# Altium PCB LCDTest.PcbDoc (part 2 of 2)
Units mm, origin at the board's own origin, x right, y up, seen from the top; angles counter-clockwise.
Board outline 42.58 x 45.09 mm, 4 copper layers (Top Layer, Internal Plane 1, Signal Layer 1, Bottom Layer), stack 0.72 mm thick; 136 components, 113 nets, 730 pads, 484 vias.
Unrouted connection lines stored in the file: 1.
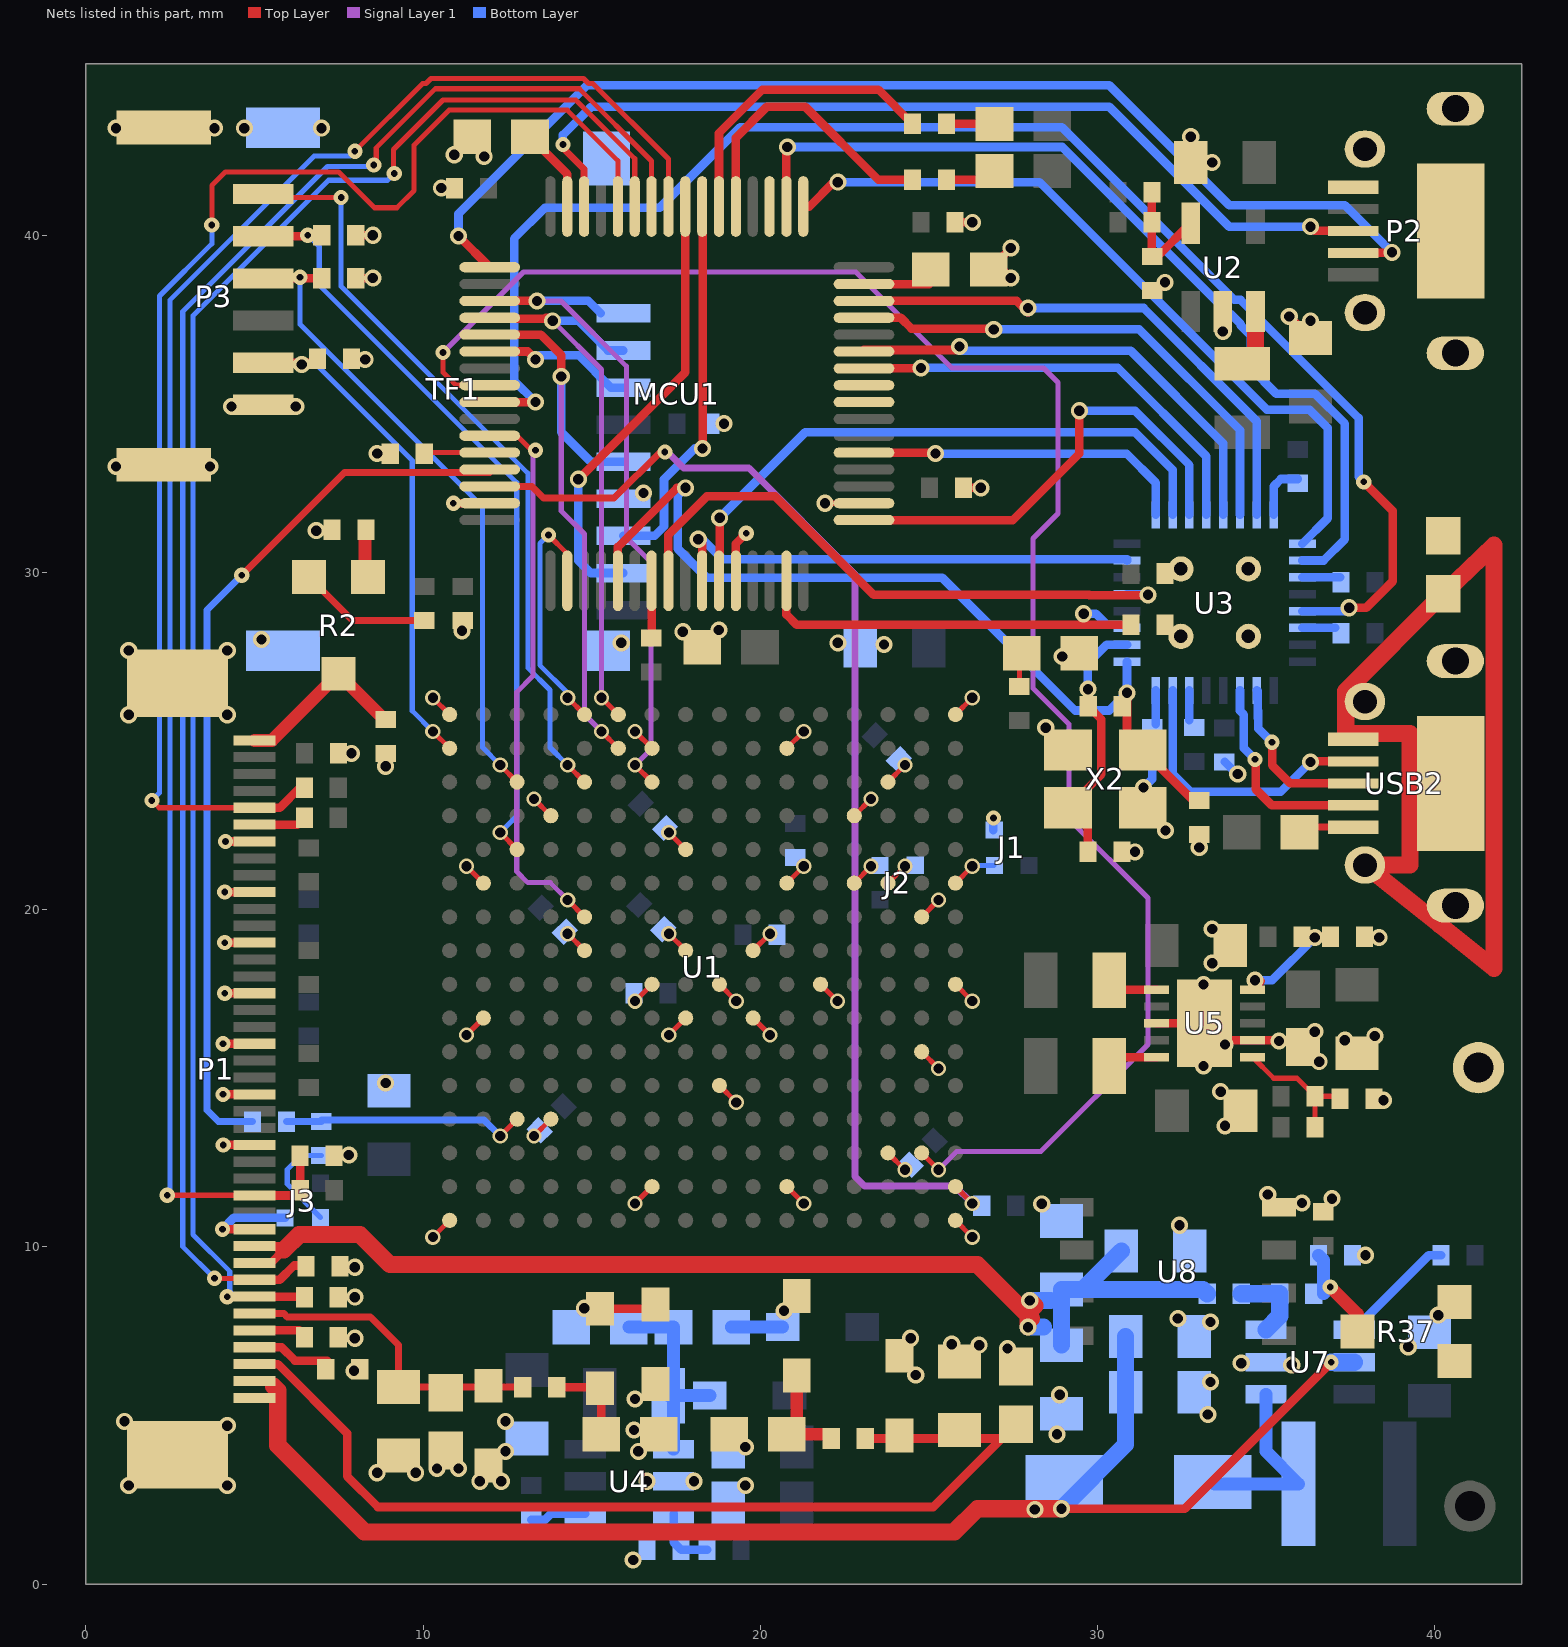
[diagram p4: the nets of this part, all layers, seen from the top]

## Via types
v1: diameter 0.45, hole 0.3, Top Layer to Bottom Layer, 255 vias
v2: diameter 0.508, hole 0.305, Top Layer to Bottom Layer, 165 vias
v3: diameter 0.45, hole 0.2, Top Layer to Bottom Layer, 64 vias

## Nets (pads, with @x,y where several pads share a name; then routed paths per layer and width w, separated by ;. In a path a pad name is that pad's centre, name@x,y a point inside that pad or via, vN(x,y) a via of type N, cw(c..) or ccw(c..) an arc to the next point about the centre after c; other vN are vias at no path point) (continued)
FPGA_CLK2: MCU1.59 U1.E10 | length 16.7
  Top Layer w0.152: MCU1.59@11.976,34.056 12.782,34.056 v3@13.183,33.655 ; v1(14.288,20.288) U1.E10@14.788,19.788
  Signal Layer 1 w0.152: v3(13.335,33.63) 13.262,33.557 13.262,26.937 12.776,26.451 12.776,21.133 13.106,20.803 13.773,20.803 v1(14.288,20.288)
FPGA_MCLK: MCU1.40 TF1.8 U1.T8 | length 14
  Top Layer w0.152: U1.T8@25.788,17.788 v1(26.288,17.288)
  Top Layer w0.254: v2(14.605,32.766) 17.776,35.937 MCU1.40@17.776,40.856
  Bottom Layer w0.254: v2(14.605,32.766) 14.605,30.353 14.972,29.986 TF1.8@15.942,29.986
GND: C1.1 C2.1 C3.1 C4.1 C5.1 C6.1 C7.1 C9.1 C10.1 C11.2 C12.1 C13.2 C14.2 C15.1 C16.1 C17.2 C18.2 C19.2 C20.2 C21.2 C22.2 C23.2 C24.2 C25.2 C27.2 C29.2 C30.2 C31.1 C33.1 C35.2 C36.2 C37.1 C38.1 C39.1 C40.1 C50.1 C51.1 C52.1 C53.2 C54.1 C68.1 C108.1 C109.2 C110.1 D2.1 D5.2 D6.2 J1.3 J2.3 J3.3 LED3.2 MCU1.12 MCU1.18 MCU1.63 P1.0 P1.7 P1.10 P1.13 P1.16 P1.19 P1.22 P1.25 P1.30 P2.5 P3.0 P3.6 pad.1 R3.1 R6.1 R8.1 R10.2 R12.1 R15.1 R16.2 R17.1 R18.1 R19.1 R20.1 R31.1 R37.2 R40.1 R41.1 R47.2 R48.2 R49.2 R50.2 R62.1 R64.2 TF1.6 TF1.SHELL U1.A1 U1.A16 U1.B7 U1.B11 U1.D4 U1.D13 U1.E9 U1.G2 U1.G8 U1.G15 U1.H7 U1.H9 U1.H12 U1.J5 U1.J8 U1.K7 U1.K9 U1.L2 U1.L15 U1.M8 U1.N13 U1.P3 U1.P11 U1.P14 U1.R6 U1.R10 U1.T1 U1.T16 U2.2 U3.0 U4.2 U5.2 U5.8 U5.11 U7.2 U8.4 X2.2 X2.4 | length 49.9
  Top Layer w0.152: v1(10.288,10.288) U1.A1@10.788,10.788 ; v1(10.288,26.288) U1.A16@10.788,25.788 ; v1(11.288,16.288) U1.B7@11.788,16.788 ; v1(11.288,21.288) U1.B11@11.788,20.788 ; v1(13.288,13.288) U1.D4@13.788,13.788 ; v1(13.288,23.288) U1.D13@13.788,22.788 ; v1(14.288,19.288) U1.E9@14.788,18.788 ; v1(16.288,11.288) U1.G2@16.788,11.788 ; v1(16.288,17.288) U1.G8@16.788,17.788 ; v1(16.288,25.288) U1.G15@16.788,24.788 ; v1(17.288,16.288) U1.H7@17.788,16.788 ; v1(17.288,19.288) U1.H9@17.788,18.788 ; v1(17.288,22.288) U1.H12@17.788,21.788 ; U1.J5@18.788,14.788 v1(19.288,14.288) ; U1.J8@18.788,17.788 v1(19.288,17.288) ; U1.K7@19.788,16.788 v1(20.288,16.288) ; U1.K9@19.788,18.788 v1(20.288,19.288) ; U1.L2@20.788,11.788 v1(21.288,11.288) ; U1.L15@20.788,24.788 v1(21.288,25.288) ; U1.M8@21.788,17.788 v1(22.288,17.288) ; v2(21.919,32.056) MCU1.18@23.076,32.056 ; U1.N13@22.788,22.788 v1(23.288,23.288) ; U1.P3@23.788,12.788 v1(24.288,12.288) ; U1.P11@23.788,20.788 v1(24.288,21.288) ; U1.P14@23.788,23.788 v1(24.288,24.288) ; U1.R6@24.788,15.788 v1(25.288,15.288) ; U1.R10@24.788,19.788 v1(25.288,20.288) ; U1.T1@25.788,10.788 v1(26.288,10.288) ; U1.T16@25.788,25.788 v1(26.288,26.288)
  Top Layer w0.254: v3(4.047,10.524) P1.30@5,10.524 ; v3(4.067,16.024) P1.19@5,16.024 ; v3(4.069,14.524) P1.22@5,14.524 ; v3(4.07,13.024) P1.25@5,13.024 ; v3(4.115,19.024) P1.13@5,19.024 ; v3(4.116,20.524) P1.10@5,20.524 ; v3(4.117,17.524) P1.16@5,17.524 ; v3(4.142,22.024) P1.7@5,22.024 ; R49.2@8.001,38.735 v2(8.509,38.735) ; R48.2@8.001,40.005 v2(8.509,40.005) ; v2(10.541,41.402) C4.1@10.93,41.402 ; v3(10.898,32.056) MCU1.63@11.976,32.056 ; v2(10.922,42.393) C11.2@11.455,42.926 11.811,42.57 v2(11.811,42.342) ; MCU1.12@19.276,29.756 19.276,30.858 v3(19.583,31.166) ; C5.1@25.773,40.386 v2(26.289,40.386) ; C6.1@26.027,32.512 v2(26.543,32.512) ; C25.2@26.772,38.989 C25.2@26.797,38.989 ; v2(27.432,38.735) 27.178,38.989 C25.2@26.797,38.989 ; v2(27.432,39.624) C25.2@26.797,38.989 ; v2(28.466,25.4) X2.4@29.126,24.74 ; C110.1@30.726,21.717 v2(31.115,21.717) ; X2.2@31.344,23.026 v2(32.018,22.352) ; R12.1@31.623,38.362 31.758,38.362 v2(32.004,38.608) ; U5.8@31.75,16.629 U5.11@33.176,16.629 ; v2(32.766,42.926) C33.1@32.766,42.164 v2(33.401,42.164) ; v2(33.02,21.844) C108.1@33.02,22.233 ; U5.11@33.676,16.129 U5.2@34.601,16.129 v2@35.357,16.129 ; v2(33.718,37.147) U2.2@33.718,37.739 ; v2(35.687,37.592) C12.1@36.322,36.957 v2(36.322,37.465)
  Bottom Layer w0.254: v3(4.047,10.524) 4.385,10.862 J3.3@5.91,10.862 ; J1.3@26.915,22.361 v3(26.915,22.724) ; v2(31.369,23.622) 31.623,23.876 R62.1@31.623,24.392 ; C109.2@33.782,24.384 34.163,24.003 v2(34.163,24.028)
  other v2: 16.231,0.711 1.27,2.921 4.191,2.921 19.558,2.921 11.684,3.048 12.319,3.048 16.637,3.048 18.034,3.048 8.636,3.302 9.779,3.302 10.414,3.429 11.049,3.429 12.446,3.937 16.383,3.937 19.558,4.064 28.804,4.445 16.256,4.572 4.191,4.699 1.143,4.826 12.446,4.826 33.274,5.029 16.281,5.486 28.88,5.613 33.35,5.994 24.613,6.198 7.95,6.325 35.763,6.502 34.265,6.553 27.33,6.985 39.218,7.036 26.492,7.087 25.679,7.112 7.976,7.29 24.46,7.29 33.35,7.772 32.385,7.874 40.107,7.976 7.976,8.509 7.976,9.398 37.948,9.754 32.436,10.643 28.346,11.278 36.068,11.303 36.957,11.43 35.052,11.557 7.798,12.725 33.782,13.589 38.481,14.351 33.655,14.605 8.89,14.859 33.147,15.367 36.576,15.494 33.782,16.002 35.382,16.104 37.338,16.129 38.227,16.256 36.449,16.383 33.147,17.78 33.401,18.415 38.354,19.177 33.401,19.431 8.89,24.257 7.874,24.638 1.27,25.781 4.191,25.781 28.956,27.508 1.27,27.686 4.191,27.686 23.673,27.864 15.875,27.915 22.301,27.915 5.207,28.016 17.704,28.245 11.151,28.27 18.771,28.296 6.833,31.242 16.535,32.36 0.889,33.147 3.683,33.147 8.636,33.528 18.923,34.417 4.318,34.925 6.223,34.925 8.28,36.322 0.889,43.18 3.81,43.18 4.699,43.18 6.985,43.18
HSWAPEN: MCU1.61 R45.1@4.936,13.716 | length 26.5
  Top Layer w0.203: v3(4.623,29.921) 7.671,32.969 11.976,32.969 MCU1.61@11.976,33.056
  Bottom Layer w0.203: v3(4.623,29.921) 3.588,28.887 3.588,14.053 3.926,13.716 R45.1@4.936,13.716
INIT_B: MCU1.56 U1.R3 | length 52.5
  Top Layer w0.152: v3(10.592,36.525) 10.592,35.941 10.977,35.556 MCU1.56@11.976,35.556 ; U1.R3@24.788,12.788 v1(25.288,12.288)
  Signal Layer 1 w0.152: v3(10.592,36.525) 12.979,38.913 22.835,38.913 25.679,36.068 28.397,36.068 28.829,35.636 28.829,31.75 28.092,31.013 28.092,26.568 29.159,25.502 29.159,22.682 31.496,20.345 31.496,16.002 28.321,12.827 25.827,12.827 v1(25.288,12.288)
NetC8_2: C8.2 R7.2 R10.1 U5.1 | length 4
  Top Layer w0.152: U5.1@34.601,15.629 35.227,15.003 35.919,15.003 C8.2@36.452,14.469 ; R7.2@36.452,13.555 C8.2@36.452,14.469 ; R10.1@37.197,14.393 37.121,14.469 C8.2@36.452,14.469
NetC11_1: C11.1 MCU1.47 | length 2.5
  Top Layer w0.254: C11.1@13.169,42.926 14.276,41.819 MCU1.47@14.276,40.856
NetC23_1: C23.1 P1.1 R2.3 | length 5.2
  Top Layer w0.381: P1.1@5,25.024 5.521,25.024 R2.3@7.493,26.996 C23.1@8.843,25.646
NetC25_1: C25.1 MCU1.31 | length 1.9
  Top Layer w0.254: MCU1.31@23.076,38.556 C25.1@25.006,38.556
NetC28_1: C28.1 D1.1 D3.2 | length 1.5
  Bottom Layer w0.381: C28.1@19.138,7.62 D3.2@20.664,7.62
  other v2: 20.701,8.103
NetC28_2: C28.2 C32.2 D7.1 L3.2 U4.1 | length 6.2
  Bottom Layer w0.381: C32.2@16.104,7.62 C28.2@17.424,7.62 L3.2@17.424,5.588 ; L3.2@17.272,5.588 L3.2@17.424,5.588 ; U4.1@17.429,3.998 17.424,4.003 L3.2@17.424,5.588 ; D7.1@18.505,5.588 L3.2@17.424,5.588
NetC29_1: C29.1 D1.2 R26.1 | length 2.6
  Top Layer w0.381: C29.1@20.789,4.445 R26.1@21.979,4.445 ; C29.1@21.082,4.738 D1.2@21.082,6.186
NetC32_1: C32.1 D4.2 D5.1 | length 1.5
  Top Layer w0.254: D4.2@15.24,8.165 D5.1@16.764,8.165
  other v2: 14.783,8.179
NetC34_2: C34.2 R12.2 R13.1 U2.5 | length 3.5
  Top Layer w0.254: R12.2@31.615,39.378 R13.1@31.615,41.275 ; R12.2@31.623,39.37 31.779,39.37 U2.5@32.768,40.36
NetC35_1: C35.1 D4.1 R27.1 | length 2.7
  Top Layer w0.254: R27.1@13.962,5.842 15.203,5.842 D4.1@15.24,5.805 15.279,5.766 C35.1@15.279,4.445
NetC51_2: C51.2 C52.2 D9.2 P1.39 P1.40 U7.5 | length 42.8
  Top Layer w0.254: v2(28.931,2.235) 32.588,2.235 v3(36.932,6.579)
  Top Layer w0.508: 5.563,5.867 5.69,5.74 5.69,4.115 8.255,1.549 25.756,1.549 26.441,2.235 v2(28.931,2.235)
  Bottom Layer w0.508: v2(28.931,2.235) 30.836,4.14 C52.2@30.836,5.69 C51.2@30.836,7.341 ; v3(36.932,6.579) U7.5@37.618,6.579
  other v2: 28.143,2.21
NetC53_1: C53.1 R37.3 R38.1 | length 3.1
  Top Layer w0.381: v3(36.906,8.814) 37.715,8.005 R37.3@37.715,7.493
  Bottom Layer w0.381: C53.1@36.559,9.754 36.703,9.609 36.703,8.611 v3(36.906,8.814)
NetC108_2: C108.2 MCU1.5 R61.2 U3.25 X2.3 | length 25.6
  Top Layer w0.254: MCU1.5@15.776,29.756 15.776,30.762 17.526,32.512 v2(17.78,32.512) ; X2.3@30.877,25.206 v2(30.877,26.432) ; X2.3@31.344,24.74 31.346,24.74 32.334,23.751 32.334,23.749 32.842,23.241 C108.2@33.02,23.241
  Bottom Layer w0.254: v2(17.78,32.512) 17.551,32.283 17.551,30.709 18.415,29.845 25.4,29.845 29.337,25.908 30.353,25.908 v2(30.877,26.432) U3.25@30.877,27.358
NetC110_2: C110.2 R61.1 U3.26 X2.1 | length 7.8
  Top Layer w0.254: C110.2@29.718,21.717 29.718,22.434 X2.1@29.126,23.026 29.128,23.026 30.117,24.014 30.117,25.644 R61.1@29.726,26.035 29.726,26.535 v2(29.718,26.543)
  Bottom Layer w0.254: v2(29.718,26.543) 29.718,27.305 30.271,27.858 U3.26@30.877,27.858
NetD9_1: D9.1 L5.2 U7.1 | length 5.6
  Bottom Layer w0.381: D9.1@33.467,2.972 L5.2@35.964,2.972 34.997,3.939 U7.1@34.997,5.629
NetJ1_2: J1.2 U1.T11 | length 1.3
  Top Layer w0.152: U1.T11@25.788,20.788 v1(26.288,21.288)
  Bottom Layer w0.152: v1@26.311,21.311 J1.2@26.924,21.311
NetJ2_2: J2.2 U1.N11 | length 0.7
  Top Layer w0.152: U1.N11@22.788,20.788 v1(23.288,21.288)
NetJ3_2: J3.2 R42.1 | length 3
  Bottom Layer w0.152: J3.2@6.96,10.871 5.969,11.862 5.969,12.294 6.383,12.708 R42.1@6.985,12.708
NetL1_1: L1.1 U5.6 | length 1.4
  Top Layer w0.254: L1.1@30.407,17.797 30.575,17.629 U5.6@31.75,17.629
NetL2_1: L2.1 U5.10 | length 1.3
  Top Layer w0.254: L2.1@30.416,15.629 U5.10@31.75,15.629
NetL7_1: L7.1 U2.3 | length 1.2
  Top Layer w0.508: L7.1@34.684,36.589 U2.3@34.684,37.739
NetLED1_2: LED1.2 R21.2 | length 1.4
  Top Layer w0.254: R21.2@25.527,41.656 LED1.2@26.949,41.656
NetLED2_2: LED2.2 R22.2 | length 1.4
  Top Layer w0.254: R22.2@25.527,43.307 LED2.2@26.949,43.307
NetLED3_1: LED3.1 R43.2 | length 0.9
  Top Layer w0.152: R43.2@27.686,26.619 LED3.1@27.686,27.545
NetMCU1_2: MCU1.2 U1.E16 | length 7.6
  Top Layer w0.152: v3(13.716,31.115) 14.276,30.555 MCU1.2@14.276,29.756 ; v1(14.288,26.288) U1.E16@14.788,25.788
  Bottom Layer w0.152: v3(13.716,31.115) 13.462,30.861 13.462,27.253 14.288,26.427 v1(14.288,26.288)
NetMCU1_7: MCU1.7 R4.1 | length 1.7
  Top Layer w0.254: R4.1@16.776,28.071 MCU1.7@16.776,29.756
NetMCU1_24: MCU1.24
NetMCU1_25: MCU1.25
NetMCU1_35: MCU1.35
NetMCU1_37: MCU1.37 R21.1 | length 8.6
  Top Layer w0.254: MCU1.37@19.276,40.856 19.276,42.898 20.193,43.815 21.336,43.815 23.495,41.656 R21.1@24.519,41.656
NetMCU1_38: MCU1.38 R22.1 | length 8.9
  Top Layer w0.254: MCU1.38@18.776,40.856 18.776,43.033 20.066,44.323 23.503,44.323 R22.1@24.519,43.307
NetMCU1_41: MCU1.41 P1.28 R14.1 R15.2 | length 51.5
  Top Layer w0.152: v3(2.413,11.532) P1.28@4.992,11.532 ; v3(7.976,42.494) 9.987,44.505 10.089,44.505 10.237,44.653 14.756,44.653 14.904,44.505 15.032,44.505 17.276,42.262 MCU1.41@17.276,40.856
  Top Layer w0.254: P1.28@5,11.524 6.198,11.524 6.35,11.676 R15.2@6.35,12.7
  Bottom Layer w0.152: v3(2.413,11.532) 2.489,11.532 2.489,38.075 6.772,42.357 7.839,42.357 v3(7.976,42.494)
NetMCU1_42: MCU1.42 P1.33 R17.2 | length 51
  Top Layer w0.152: v3(3.81,9.068) P1.33@4.956,9.068 ; v3(8.534,42.088) 8.611,42.164 8.611,42.596 10.363,44.348 14.63,44.348 16.776,42.202 MCU1.42@16.776,40.856
  Top Layer w0.254: P1.33@5,9.024 5.747,9.024 6.172,9.449 R17.2@6.477,9.449
  Bottom Layer w0.152: v3(3.81,9.068) 2.87,10.008 2.87,37.744 7.166,42.041 8.487,42.041 v3(8.534,42.088)
NetMCU1_43: MCU1.43 P1.34 R18.2 | length 49.3
  Top Layer w0.152: v3(9.144,41.834) 9.119,41.859 9.119,42.545 10.592,44.018 14.529,44.018 16.276,42.271 MCU1.43@16.276,40.856
  Top Layer w0.254: P1.34@5,8.524 R18.2@6.335,8.524
  Bottom Layer w0.152: v3(4.191,8.524) 4.303,8.636 4.318,8.636 4.264,8.69 4.264,9.275 3.175,10.363 3.175,37.617 7.192,41.634 8.944,41.634 v3(9.144,41.834)
NetMCU1_44: MCU1.44 P1.5 R9.2 | length 40.5
  Top Layer w0.152: v3(1.956,23.241) 2.173,23.024 P1.5@5,23.024 ; v3(3.734,40.31) 3.734,41.478 4.14,41.885 7.493,41.885 8.56,40.818 9.22,40.818 9.728,41.326 9.728,42.672 10.77,43.713 14.275,43.713 15.776,42.212 MCU1.44@15.776,40.856
  Top Layer w0.254: P1.5@5,23.024 5.752,23.024 6.35,23.622 R9.2@6.477,23.622
  Bottom Layer w0.152: v3(1.956,23.241) 2.184,23.47 2.184,38.201 3.734,39.75 v3(3.734,40.31)
NetMCU1_60: MCU1.60 R3.2 | length 1.9
  Top Layer w0.152: R3.2@10.061,33.556 MCU1.60@11.976,33.556
NetP1_6: P1.6 R11.2 | length 1.3
  Top Layer w0.254: P1.6@5,22.524 R11.2@6.268,22.524
NetP1_31: P1.31 P1.32 R8.2 R39.1 R40.2 R41.2 | length 35
  Top Layer w0.254: P1.32@5,9.524 5.485,9.524 5.867,9.906 ; P1.31@5,10.024 5.909,10.024
  Top Layer w0.508: 5.867,9.906 6.325,10.363 8.128,10.363 9.017,9.474 26.441,9.474 27.94,7.976 ; v2(27.94,7.62) 27.94,7.976 ; v2(27.991,8.407) 28.143,8.255 27.94,8.052 27.94,7.976 ; 28.042,7.874 27.94,7.976
  Bottom Layer w0.508: v2(27.94,7.62) 28.397,7.62 ; v2(27.991,8.407) R40.2@28.6,8.407 ; R8.2@28.931,7.087 R40.2@28.931,8.738 29.566,8.738 ; R41.2@30.709,9.881 29.566,8.738 ; R39.1@33.257,8.611 33.13,8.738 29.566,8.738
NetP1_36: P1.36 R19.2 | length 1.3
  Top Layer w0.254: P1.36@5,7.524 R19.2@6.319,7.524
NetP1_37: P1.37 R20.2 | length 2.3
  Top Layer w0.254: P1.37@5,7.024 5.803,7.024 6.198,6.629 R20.2@7.163,6.629
NetR1_1: R1.1 R2.2 | length 3.9
  Top Layer w0.203: R2.2@6.618,29.871 7.906,28.583 R1.1@10.033,28.583
NetR2_1: R2.1 R6.2 | length 1.2
  Top Layer w0.381: R2.1@8.28,29.959 R6.2@8.28,31.191
NetR5_2: R5.2 R16.1 U5.5 | length 3.7
  Top Layer w0.254: U5.5@34.601,17.629 34.849,17.877 34.819,17.907 v2(34.671,17.907) ; R5.2@36.071,19.194 R16.1@36.917,19.194
  Bottom Layer w0.254: v2(34.671,17.907) 35.179,17.907 v2(36.449,19.177)
NetR23_1: R23.1 U3.14 | length 1
  Bottom Layer w0.254: U3.14@36.077,28.358 R23.1@37.055,28.358
NetR24_1: R24.1 U3.11 | length 1.1
  Bottom Layer w0.254: U3.11@36.077,29.858 R24.1@37.206,29.858
NetR25_1: R25.1 U3.8 | length 1.7
  Bottom Layer w0.254: U3.8@35.227,31.708 35.227,32.56 35.441,32.774 R25.1@35.941,32.774
NetR28_1: R28.1 U7.4 | length 3.5
  Bottom Layer w0.254: U7.4@37.617,7.544 39.827,9.754 R28.1@40.191,9.754
NetR29_1: R29.1 U4.4 | length 1.7
  Bottom Layer w0.254: R29.1@13.208,1.913 13.622,1.913 13.792,2.083 U4.4@14.808,2.083
NetR30_1: R30.1 R31.2 U4.3 | length 1.9
  Bottom Layer w0.254: U4.3@17.429,2.083 17.429,1.24 R31.2@17.653,1.016 R30.1@18.423,1.016
NetR37_1: R37.1
NetR38_2: R38.2 R39.2 U7.3 | length 2.4
  Bottom Layer w0.508: R39.2@34.265,8.611 R38.2@35.408,8.611 35.408,7.955 U7.3@34.997,7.544
NetR42_2: R42.2 R45.2@5.944,13.716 U1.C4 | length 7.3
  Top Layer w0.152: v1(12.288,13.288) U1.C4@12.788,13.788
  Bottom Layer w0.203: R45.2@5.944,13.716 R42.2@6.985,13.716 6.985,13.767 11.809,13.767 v1(12.288,13.288)
NetR45_1: R45.1@21.031,21.547 U1.L11 | length 0.7
  Top Layer w0.152: U1.L11@20.788,20.788 v1(21.288,21.288)
NetR46_2: R46.2 USB2.1 | length 1.4
  Top Layer w0.203: R46.2@36.14,22.449 USB2.1@37.584,22.449
NetR47_1: R47.1 USB2.5 | length 31.9
  Top Layer w0.508: R47.1@40.259,29.376 37.363,26.48 37.363,25.222 39.268,25.222 39.268,21.324 USB2.5@37.934,21.324 40.153,19.548 41.758,18.263 41.758,30.81 R47.1@40.31,29.413
NetR60_2: R60.2 U3.22 | length 0.9
  Bottom Layer w0.254: R60.2@32.727,25.615 U3.22@32.727,26.508
NetR62_2: R62.2 U3.24 | length 1
  Bottom Layer w0.254: R62.2@31.727,25.504 U3.24@31.727,26.508
NetU3_23: U3.23 USB2.4 | length 8.4
  Top Layer w0.254: v2(36.322,24.384) 36.337,24.399 USB2.4@37.584,24.399
  Bottom Layer w0.254: U3.23@32.227,26.508 32.227,24.034 32.766,23.495 35.433,23.495 v2(36.322,24.384)
PA13: MCU1.46 P2.3 | length 27.6
  Top Layer w0.203: v3(14.148,42.697) 14.097,42.647 14.776,41.968 MCU1.46@14.776,40.856
  Top Layer w0.254: v2@36.449,40.132 P2.3@37.584,40.132
  Bottom Layer w0.254: v3(14.148,42.697) 14.148,42.977 14.986,43.815 30.353,43.815 33.909,40.259 v2(36.322,40.259)
PA14: MCU1.49 P2.2 | length 34.4
  Top Layer w0.254: v2(11.049,39.983) MCU1.49@11.976,39.056 ; P2.2@37.584,39.482 38.72,39.482 v2(38.735,39.497)
  Bottom Layer w0.254: v2(11.049,39.983) 11.049,40.64 14.859,44.45 30.353,44.45 33.909,40.894 37.338,40.894 v2(38.735,39.497)
PC8: MCU1.39 TF1.7 | length 11.4
  Top Layer w0.254: MCU1.39@18.276,40.856 18.288,40.844 v2(18.288,33.68)
  Bottom Layer w0.254: TF1.7@15.942,31.086 16.862,31.086 17.145,31.369 17.145,32.766 17.665,33.286 18.059,33.68 v2(18.288,33.68)
PC10: MCU1.51 TF1.1 U1.G14 | length 19.9
  Top Layer w0.152: v1(16.288,24.288) U1.G14@16.788,23.788
  Top Layer w0.254: MCU1.51@11.976,38.056 v2(13.379,38.056)
  Signal Layer 1 w0.152: v2(13.379,38.056) 14.09,38.056 16.027,36.119 16.027,31.039 16.764,30.302 16.764,24.764 v1(16.288,24.288)
  Bottom Layer w0.254: v2(13.379,38.056) 14.903,38.056 TF1.1@15.273,37.686
PC11: MCU1.52 TF1.2 U1.F16 | length 17
  Top Layer w0.152: v1(15.288,26.288) U1.F16@15.788,25.788
  Top Layer w0.254: MCU1.52@11.976,37.556 11.976,37.523 13.6,37.523 13.633,37.556 13.879,37.556 13.879,37.501 v2(13.843,37.465)
  Signal Layer 1 w0.152: v2(13.843,37.465) 15.288,36.02 15.288,28.397 15.291,28.394 15.291,26.291 v1(15.288,26.288)
  Bottom Layer w0.254: v2(13.843,37.465) 14.605,37.465 15.484,36.586 TF1.2@15.942,36.586
PC12: MCU1.53 TF1.5 U1.F15 | length 18.6
  Top Layer w0.152: v1(15.288,25.288) U1.F15@15.788,24.788
  Top Layer w0.254: MCU1.53@11.976,37.056 13.49,37.056 14.097,36.449 v2(14.097,35.814)
  Signal Layer 1 w0.152: v2(14.097,35.814) 14.097,31.826 14.783,31.14 14.783,25.793 v1(15.288,25.288)
  Bottom Layer w0.254: v2(14.097,35.814) 14.097,34.163 14.974,33.286 TF1.5@15.942,33.286
PD2: MCU1.54 TF1.3 | length 4.5
  Top Layer w0.254: MCU1.54@11.976,36.556 13.101,36.556 v2(13.335,36.322)
  Bottom Layer w0.254: v2(13.335,36.322) 13.462,36.449 14.605,36.449 15.568,35.486 TF1.3@15.942,35.486
PROGRAM: MCU1.62 R44.2 U1.T2 | length 35.4
  Top Layer w0.152: U1.T2@25.788,11.788 v1(26.288,11.288)
  Top Layer w0.203: MCU1.62@11.976,32.556 13.227,32.556 13.575,32.207 15.665,32.207 17.036,33.579 v3(17.17,33.579)
  Signal Layer 1 w0.203: v3(17.17,33.579) 17.247,33.579 17.729,33.096 19.66,33.096 22.809,29.947 22.809,28.125 22.809,27.704 22.809,12.09 23.09,11.809 25.767,11.809 v1(26.288,11.288)
TCK: P3.3 R49.1 U1.C14 | length 19.4
  Top Layer w0.152: v1(12.288,24.288) U1.C14@12.788,23.788
  Top Layer w0.254: P3.3@5.26,38.725 R49.1@6.983,38.725
  Bottom Layer w0.152: v3(6.35,38.76) 6.35,37.363 11.76,31.953 11.76,24.816 v1(12.288,24.288)
TDI: P3.2 R48.1 U1.C12 | length 22.9
  Top Layer w0.152: v1(12.288,22.288) U1.C12@12.788,21.788
  Top Layer w0.254: P3.2@5.26,39.975 R48.1@6.963,39.975
  Bottom Layer w0.152: v3(6.579,40.005) 6.921,39.662 6.921,38.519 12.776,32.664 12.776,22.776 v1(12.288,22.288)
TDO: P3.1 U1.E14 | length 22.7
  Top Layer w0.152: P3.1@5.26,41.225 5.362,41.123 v3(7.569,41.123) ; v1(14.288,24.288) U1.E14@14.788,23.788
  Bottom Layer w0.152: v3(7.569,41.123) 7.569,38.481 13.106,32.944 13.106,27.178 13.767,26.518 13.767,24.809 v1(14.288,24.288)
TMS: P3.5 R50.1 U1.A15 | length 14.9
  Top Layer w0.152: v1(10.288,25.288) U1.A15@10.788,24.788
  Top Layer w0.254: P3.5@5.26,36.225 R50.1@6.709,36.225
  Bottom Layer w0.152: v2@6.426,36.195 6.807,36.195 9.677,33.325 9.677,25.899 v1(10.288,25.288)
  other v2: 6.401,36.17
USB_HS_CK: MCU1.21 U3.1 | length 9.9
  Top Layer w0.254: MCU1.21@23.076,33.556 v2@25.169,33.556
  Bottom Layer w0.254: v2(25.197,33.528) 30.861,33.528 31.727,32.662 U3.1@31.727,31.708
USB_HS_D0: MCU1.17 U3.3 | length 13.9
  Top Layer w0.254: MCU1.17@23.076,31.556 27.492,31.556 29.464,33.528 v2(29.464,34.798)
  Bottom Layer w0.254: v2(29.464,34.798) 31.115,34.798 32.727,33.186 U3.3@32.727,31.708
USB_HS_D1: MCU1.26 U3.4 | length 13
  Top Layer w0.254: MCU1.26@23.076,36.056 24.753,36.056 v2(24.765,36.068)
  Bottom Layer w0.254: v2(24.765,36.068) 30.607,36.068 33.227,33.448 U3.4@33.227,31.708
USB_HS_D2: MCU1.27 U3.5 | length 14
  Top Layer w0.254: MCU1.27@23.076,36.556 23.076,36.601 v2@25.806,36.601
  Bottom Layer w0.254: v2(25.908,36.703) 25.908,36.576 30.988,36.576 33.727,33.837 U3.5@33.727,31.708
USB_HS_D3: MCU1.29 U3.6 | length 15
  Top Layer w0.254: MCU1.29@23.076,37.556 24.166,37.556 24.486,37.236 v2@26.899,37.236
  Bottom Layer w0.254: v2(26.924,37.211) 31.242,37.211 34.227,34.226 U3.6@34.227,31.708
USB_HS_D4: MCU1.30 U3.7 | length 16.1
  Top Layer w0.254: MCU1.30@23.076,38.056 27.603,38.056 27.94,37.719 v2(27.94,37.846)
  Bottom Layer w0.254: v2(27.94,37.846) 31.369,37.846 34.727,34.488 U3.7@34.727,31.708
USB_HS_D5: MCU1.33 U3.9 | length 22.6
  Top Layer w0.254: MCU1.33@21.276,40.856 21.457,40.856 22.181,41.58 v2(22.301,41.58)
  Bottom Layer w0.254: v2(22.301,41.58) 28.278,41.58 35.026,34.831 36.289,34.831 36.83,34.29 36.83,31.611 U3.9@36.077,30.858
USB_HS_D6: MCU1.34 U3.10 | length 27.2
  Top Layer w0.254: MCU1.34@20.776,40.856 v2@20.776,42.595
  Bottom Layer w0.254: v2(20.803,42.621) 28.956,42.621 33.896,37.681 33.939,37.681 34.252,37.368 34.252,37.325 34.544,37.033 34.544,36.068 35.306,35.306 36.449,35.306 37.338,34.417 37.338,30.988 36.708,30.358 U3.10@36.077,30.358
USB_HS_D7: MCU1.57 U3.13 | length 44.6
  Top Layer w0.254: MCU1.57@11.976,35.056 v2(13.331,35.056) ; v2(37.465,28.956) 37.973,28.956 38.76,29.743 38.76,31.826 v3(37.897,32.69)
  Bottom Layer w0.254: v2(13.331,35.056) 12.7,35.687 12.7,39.903 13.614,40.818 17.018,40.818 19.406,43.205 28.947,43.205 34.065,38.087 34.243,38.087 37.744,34.585 37.744,32.842 v3(37.897,32.69) ; U3.13@36.077,28.858 v2@37.367,28.858
USB_HS_DIR: MCU1.10 U3.31 | length 14.3
  Top Layer w0.254: v2(18.161,30.988) 18.276,30.873 MCU1.10@18.276,29.756
  Bottom Layer w0.254: v2(18.161,30.988) 18.288,30.988 18.884,30.392 30.877,30.392 U3.31@30.877,30.358
USB_HS_N: U3.19 USB2.2 | length 6.2
  Top Layer w0.254: v3(34.671,24.46) 34.696,24.435 34.696,23.571 35.169,23.099 USB2.2@37.584,23.099
  Bottom Layer w0.254: U3.19@34.227,26.508 34.227,25.901 34.341,25.787 34.341,24.79 ; 34.366,24.765 v3(34.671,24.46)
USB_HS_NXT: MCU1.11 U3.2 | length 18.1
  Top Layer w0.254: MCU1.11@18.796,29.776 v2(18.796,31.623)
  Bottom Layer w0.254: v2(18.796,31.623) 21.336,34.163 31.115,34.163 32.227,33.051 U3.2@32.227,31.708
USB_HS_P: U3.18 USB2.3 | length 5
  Top Layer w0.254: v3(35.179,24.968) 35.179,24.282 35.712,23.749 USB2.3@37.584,23.749
  Bottom Layer w0.254: U3.18@34.727,26.508 34.747,26.489 34.772,25.375 v3(35.179,24.968)
USB_HS_RESET: MCU1.15 R64.1 U3.27 | length 12.8
  Top Layer w0.254: MCU1.15@20.776,29.756 20.776,28.754 21.082,28.448 R64.1@30.996,28.448
  Bottom Layer w0.254: v2(29.591,28.778) 29.956,28.778 30.282,28.452 30.784,28.452 U3.27@30.877,28.358
USB_HS_STP: MCU1.8 U3.29 | length 17.9
  Top Layer w0.254: MCU1.8@17.276,29.756 17.276,31.119 18.415,32.258 20.447,32.258 23.368,29.337 29.752,29.337 29.764,29.325 31.484,29.325 31.496,29.337 v2(31.496,29.339)
  Bottom Layer w0.254: U3.29@30.877,29.358 31.477,29.358 v2(31.496,29.339)
VGH: C30.1 C31.2 D2.2 P1.38 R26.2 | length 30.1
  Top Layer w0.254: P1.38@5,6.524 5.693,6.524 7.747,4.47 7.747,3.2 8.661,2.286 25.132,2.286 C30.1@27.164,4.318 ; R26.2@23.114,4.318 C30.1@27.164,4.318 ; C30.1@27.584,4.738 C30.1@27.164,4.318
VGL: C36.1 C37.2 D6.1 P1.35 R27.2 | length 9.6
  Top Layer w0.203: P1.35@5,8.024 5.87,8.024 5.969,7.925 8.433,7.925 9.271,7.087 C37.2@9.271,5.842 R27.2@12.954,5.842
pads on no net: MCU1.3 MCU1.4 MCU1.6 MCU1.9 MCU1.14 MCU1.16 MCU1.20 MCU1.22 MCU1.28 MCU1.36 MCU1.45 MCU1.50 P1.4 P1.23 P1.24 P1.26 P1.27 P2.4 TF1.9 U1.A2 U1.A3 U1.A4 U1.A5 U1.A6 U1.A7 U1.A13 U1.A14 U1.B1 U1.B2 U1.B3 U1.B5 U1.B6 U1.B14 U1.B15 U1.B16 U1.C1 U1.C2 U1.C3 U1.C5 U1.C6 U1.C7 U1.C8 U1.C13 U1.C15 U1.C16 U1.D1 U1.D3 U1.D5 U1.D6 U1.D8 U1.D9 U1.D11 U1.D12 U1.D14 U1.D16 U1.E1 U1.E2 U1.E3 U1.E4 U1.E6 U1.E7 U1.E8 U1.E11 U1.E12 U1.E13 U1.E15 U1.F1 U1.F2 U1.F3 U1.F4 U1.F5 U1.F6 U1.F7 U1.F9 U1.F10 U1.F12 U1.F13 U1.F14 U1.G1 U1.G3 U1.G5 U1.G6 U1.G11 U1.G12 U1.G16 U1.H1 U1.H2 U1.H3 U1.H4 U1.H5 U1.H11 U1.H13 U1.H14 U1.H15 U1.H16 U1.J1 U1.J3 U1.J4 U1.J6 U1.J11 U1.J12 U1.J13 U1.J14 U1.J16 U1.K1 U1.K2 U1.K3 U1.K5 U1.K6 U1.K11 U1.K12 U1.K14 U1.K15 U1.K16 U1.L1 U1.L3 U1.L4 U1.L5 U1.L7 U1.L8 U1.L10 U1.L12 U1.L13 U1.L14 U1.L16 U1.M1 U1.M2 U1.M3 U1.M4 U1.M5 U1.M6 U1.M7 U1.M9 U1.M10 U1.M11 U1.M12 U1.M13 U1.M14 U1.M15 U1.M16 U1.N1 U1.N3 U1.N4 U1.N5 U1.N6 U1.N8 U1.N9 U1.N12 U1.N14 U1.N16 U1.P1 U1.P2 U1.P4 U1.P5 U1.P6 U1.P7 U1.P8 U1.P9 U1.P12 U1.P15 U1.P16 U1.R1 U1.R2 U1.R5 U1.R7 U1.R9 U1.R12 U1.R14 U1.R15 U1.R16 U1.T4 U1.T5 U1.T6 U1.T7 U1.T9 U1.T12 U1.T13 U1.T14 U1.T15 U3.12 U3.15 U3.16 U3.17 U4.6
copper on no net: | length 113.1
  Top Layer w0.152: v1(10.288,11.288) 10.788,11.788 ; v1(10.288,12.288) 10.788,12.788 ; v1(10.288,13.288) 10.788,13.788 ; v1(10.288,14.288) 10.788,14.788 ; v1(10.288,15.288) 10.788,15.788 ; v1(10.288,16.288) 10.788,16.788 ; v1(10.288,23.288) 10.788,22.788 ; v1(10.288,24.288) 10.788,23.788 ; v1(11.288,10.288) 11.788,10.788 ; v1(11.288,11.288) 11.788,11.788 ; v1(11.288,12.288) 11.788,12.788 ; v1(11.288,14.288) 11.788,14.788 ; v1(11.288,15.288) 11.788,15.788 ; v1(11.288,24.288) 11.788,23.788 ; v1(11.288,25.288) 11.788,24.788 ; v1(11.288,26.288) 11.788,25.788 ; v1(12.288,10.288) 12.788,10.788 ; v1(12.288,11.288) 12.788,11.788 ; v1(12.288,12.288) 12.788,12.788 ; v1(12.288,14.288) 12.788,14.788 ; v1(12.288,15.288) 12.788,15.788 ; v1(12.288,16.288) 12.788,16.788 ; v1(12.288,17.288) 12.788,17.788 ; v1(12.288,23.288) 12.788,22.788 ; v1(12.288,25.288) 12.788,24.788 ; v1(12.288,26.288) 12.788,25.788 ; v1(13.288,10.288) 13.788,10.788 ; v1(13.288,12.288) 13.788,12.788 ; v1(13.288,14.288) 13.788,14.788 ; v1(13.288,15.288) 13.788,15.788 ; v1(13.288,17.288) 13.788,17.788 ; v1(13.288,19.288) 13.788,18.788 ; v1(13.288,21.288) 13.788,20.788 ; v1(13.288,22.288) 13.788,21.788 ; v1(13.288,24.288) 13.788,23.788 ; v1(13.288,26.288) 13.788,25.788 ; v1(14.288,10.288) 14.788,10.788 ; v1(14.288,11.288) 14.788,11.788 ; v1(14.288,12.288) 14.788,12.788 ; v1(14.288,13.288) 14.788,13.788 ; v1(14.288,15.288) 14.788,15.788 ; v1(14.288,16.288) 14.788,16.788 ; v1(14.288,17.288) 14.788,17.788 ; v1(14.288,21.288) 14.788,20.788 ; v1(14.288,22.288) 14.788,21.788 ; v1(14.288,23.288) 14.788,22.788 ; v1(14.288,25.288) 14.788,24.788 ; v1(15.288,10.288) 15.788,10.788 ; v1(15.288,11.288) 15.788,11.788 ; v1(15.288,12.288) 15.788,12.788 ; v1(15.288,13.288) 15.788,13.788 ; v1(15.288,14.288) 15.788,14.788 ; v1(15.288,15.288) 15.788,15.788 ; v1(15.288,16.288) 15.788,16.788 ; v1(15.288,19.288) 15.788,18.788 ; v1(15.288,20.288) 15.788,19.788 ; v1(15.288,22.288) 15.788,21.788 ; v1(15.288,23.288) 15.788,22.788 ; v1(15.288,24.288) 15.788,23.788 ; v1(16.288,10.288) 16.788,10.788 ; v1(16.288,12.288) 16.788,12.788 ; v1(16.288,14.288) 16.788,14.788 ; v1(16.288,15.288) 16.788,15.788 ; v1(16.288,21.288) 16.788,20.788 ; v1(16.288,22.288) 16.788,21.788 ; v1(16.288,26.288) 16.788,25.788 ; v1(17.288,10.288) 17.788,10.788 ; v1(17.288,11.288) 17.788,11.788 ; v1(17.288,12.288) 17.788,12.788 ; v1(17.288,13.288) 17.788,13.788 ; v1(17.288,14.288) 17.788,14.788 ; v1(17.288,21.288) 17.788,20.788 ; v1(17.288,23.288) 17.788,22.788 ; v1(17.288,24.288) 17.788,23.788 ; v1(17.288,25.288) 17.788,24.788 ; v1(17.288,26.288) 17.788,25.788 ; 18.788,10.788 v1(19.288,10.288) ; 18.788,12.788 v1(19.288,12.288) ; 18.788,13.788 v1(19.288,13.288) ; 18.788,15.788 v1(19.288,15.288) ; 18.788,20.788 v1(19.288,21.288) ; 18.788,21.788 v1(19.288,22.288) ; 18.788,22.788 v1(19.288,23.288) ; 18.788,23.788 v1(19.288,24.288) ; 18.788,25.788 v1(19.288,26.288) ; 19.788,10.788 v1(20.288,10.288) ; 19.788,11.788 v1(20.288,11.288) ; 19.788,12.788 v1(20.288,12.288) ; 19.788,14.788 v1(20.288,14.288) ; 19.788,15.788 v1(20.288,15.288) ; 19.788,20.788 v1(20.288,21.288) ; 19.788,21.788 v1(20.288,22.288) ; 19.788,23.788 v1(20.288,24.288) ; 19.788,24.788 v1(20.288,25.288) ; 19.788,25.788 v1(20.288,26.288) ; 20.788,10.788 v1(21.288,10.288) ; 20.788,12.788 v1(21.288,12.288) ; 20.788,13.788 v1(21.288,13.288) ; 20.788,14.788 v1(21.288,14.288) ; 20.788,16.788 v1(21.288,16.288) ; 20.788,17.788 v1(21.288,17.288) ; 20.788,19.788 v1(21.288,20.288) ; 20.788,21.788 21.288,22.288 ; 20.788,22.788 v1(21.288,23.288) ; 20.788,23.788 v1(21.288,24.288) ; 20.788,25.788 v1(21.288,26.288) ; 21.788,10.788 v1(22.288,10.288) ; 21.788,11.788 v1(22.288,11.288) ; 21.788,12.788 v1(22.288,12.288) ; 21.788,13.788 v1(22.288,13.288) ; 21.788,14.788 v1(22.288,14.288) ; 21.788,15.788 v1(22.288,15.288) ; 21.788,16.788 v1(22.288,16.288) ; 21.788,18.788 v1(22.288,19.288) ; 21.788,19.788 v1(22.288,20.288) ; 21.788,20.788 v1(22.288,21.288) ; 21.788,21.788 v1(22.288,22.288) ; 21.788,22.788 v1(22.288,23.288) ; 21.788,23.788 v1(22.288,24.288) ; 21.788,24.788 v1(22.288,25.288) ; 21.788,25.788 v1(22.288,26.288) ; 22.788,10.788 v1(23.288,10.288) ; 22.788,12.788 v1(23.288,12.288) ; 22.788,13.788 v1(23.288,13.288) ; 22.788,14.788 v1(23.288,14.288) ; 22.788,15.788 v1(23.288,15.288) ; 22.788,17.788 v1(23.288,17.288) ; 22.788,18.788 v1(23.288,19.288) ; 22.788,21.788 v1(23.288,22.288) ; 22.788,23.788 v1(23.288,24.288) ; 22.788,25.788 v1(23.288,26.288) ; 23.788,10.788 v1(24.288,10.288) ; 23.788,11.788 v1(24.288,11.288) ; 23.788,13.788 v1(24.288,13.288) ; 23.788,14.788 v1(24.288,14.288) ; 23.788,15.788 v1(24.288,15.288) ; 23.788,16.788 v1(24.288,16.288) ; 23.788,17.788 v1(24.288,17.288) ; 23.788,18.788 v1(24.288,19.288) ; 23.788,21.788 v1(24.288,22.288) ; 23.788,24.788 v1(24.288,25.288) ; 23.788,25.788 v1(24.288,26.288) ; 24.788,10.788 v1(25.288,10.288) ; 24.788,11.788 v1(25.288,11.288) ; 24.788,14.788 v1(25.288,14.288) ; 24.788,16.788 v1(25.288,16.288) ; 24.788,18.788 v1(25.288,19.288) ; 24.788,21.788 v1(25.288,22.288) ; 24.788,23.788 v1(25.288,24.288) ; 24.788,24.788 v1(25.288,25.288) ; 24.788,25.788 v1(25.288,26.288) ; 25.788,13.788 v1(26.288,13.288) ; 25.788,14.788 v1(26.288,14.288) ; 25.788,15.788 v1(26.288,15.288) ; 25.788,16.788 v1(26.288,16.288) ; 25.788,18.788 v1(26.288,19.288) ; 25.788,21.788 v1(26.288,22.288) ; 25.788,22.788 v1(26.288,23.288) ; 25.788,23.788 v1(26.288,24.288) ; 25.788,24.788 v1(26.288,25.288)

## Polygon pours and split planes (outlines as drawn)
NetR47_1 on Top Layer "Bottom Layer-No Net" (solid, remove dead copper, pour order 10): 41.758,30.81 37.363,26.48 37.2,21.141 41.726,18.288
GND on Top Layer "Bottom Layer-No Net" (solid, remove dead copper, pour order 9): 0,45.085 42.581,45.085 42.581,0 0,0
GND on Bottom Layer "Bottom Layer-No Net" (solid, remove dead copper, pour order 8): 0,45.085 42.581,45.085 42.494,44.998 42.494,-0.127 0.127,-0.127 0,0
1.2 on Bottom Layer "Bottom Layer-No Net" (solid, remove dead copper, pour order 6): 17.272,20.828 28.423,19.279 28.423,17.288 19.279,15.748 16.281,15.748 15.748,16.281 15.748,19.279
3.3D on Signal Layer 1 "Bottom Layer-No Net" (solid, remove dead copper, pour order 7): 0,0 0,45.085 42.418,45.085 42.581,44.922 42.581,0
GND on Internal Plane 1 (split plane): 42.07,0.51 0.51,0.51 0.51,44.575 42.07,44.575

## Keep-outs
Keep-Out Layer:
  the board outline again, w0.254